# Altium PCB Mad17(grr).PcbDoc (part 2 of 3)
Units mil, origin at the board's own origin, x right, y up, seen from the top; angles counter-clockwise.
Board outline 5600 x 3900 mil, 2 copper layers (Top Layer, Bottom Layer); 72 components, 51 nets, 251 pads, 49 vias.
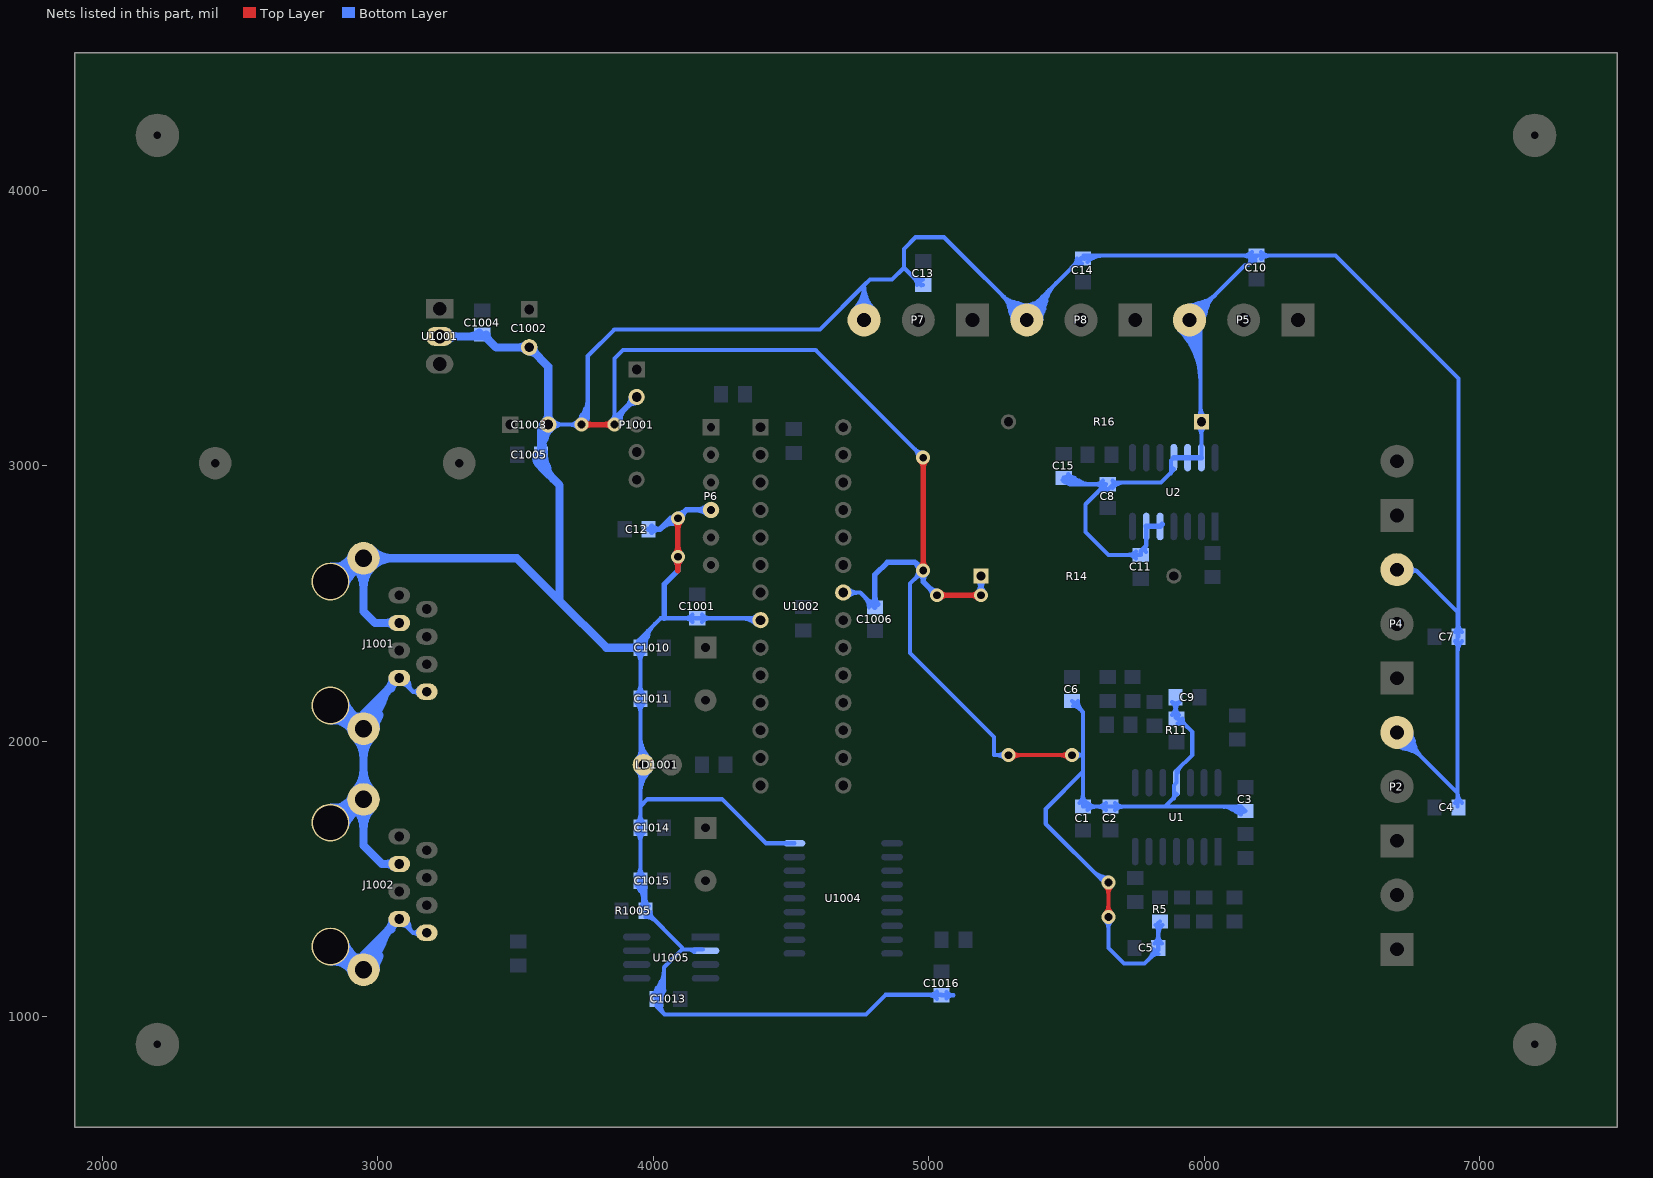
[diagram p2: the nets of this part, all layers, seen from the top]

## Via types
v1: diameter 50, hole 28, Top Layer to Bottom Layer, 49 vias

## Nets (pads, with @x,y where several pads share a name; then routed paths per layer and width w, separated by ;. In a path a pad name is that pad's centre, name@x,y a point inside that pad or via, vN(x,y) a via of type N, cw(c..) or ccw(c..) an arc to the next point about the centre after c; other vN are vias at no path point) (continued)
CAN_GND: C1.2 C2.2 C3.1 C4.2 C5.1 C6.1 C7.2 C8.2 C9.1 C10.2 C11.1 C12.2 C13.2 C14.2 C15.1 C1001.2 C1002.2 C1003.2 C1004.1 C1005.1 C1006.1 C1010.1 C1011.1 C1013.2 C1014.1 C1015.1 C1016.2 J1001.3 J1001.7 J1001.8 J1001.S J1002.3 J1002.7 J1002.8 J1002.S LD1001.2 P2.3 P4.3 P5.3 P6.4 P7.3 P8.3 P1001.2 R5.1 R11.2 R14.1 R16.1 R1005.2 U1.11 U2.5 U2.6 U2.11 U2.12 U2.13 U1001.2 U1002.8 U1002.22 U1004.9 U1005.2 | length 60231.9
  Top Layer w15: v1(5290,1950) v1(5520,1950) ; v1(5652.68,1362.68) v1(5652.68,1487.32) ; 5332.25,1950 cw(c5332.25,1992.25) 5302.37,1962.37 ccw(c5332.25,1992.25) 5332.25,1950 ; 5332.25,1950 ccw(c5332.25,1907.75) 5302.37,1937.63 cw(c5332.25,1907.75) 5332.25,1950 ; 5477.75,1950 cw(c5477.75,1907.75) 5507.63,1937.63 ccw(c5477.75,1907.75) 5477.75,1950 ; 5477.75,1950 ccw(c5477.75,1992.25) 5507.63,1962.37 cw(c5477.75,1992.25) 5477.75,1950 ; 5652.68,1404.93 cw(c5610.44,1404.93) 5640.31,1375.06 ccw(c5610.44,1404.93) 5652.68,1404.93 ; 5652.68,1404.93 ccw(c5694.93,1404.93) 5665.06,1375.06 cw(c5694.93,1404.93) 5652.68,1404.93 ; 5652.68,1445.07 cw(c5694.93,1445.07) 5665.06,1474.94 ccw(c5694.93,1445.07) 5652.68,1445.07 ; 5652.68,1445.07 ccw(c5610.44,1445.07) 5640.31,1474.94 cw(c5610.44,1445.07) 5652.68,1445.07
  Top Layer w20: v1(3740,3150) v1(3860,3150) ; 4090,2620 v1(4090,2670) v1(4090,2810) ; v1(4980,2620) v1(4980,3030) ; v1(5030,2530) v1(5190,2530) ; 3776.21,3150 cw(c3776.21,3186.21) 3750.61,3160.61 ccw(c3776.21,3186.21) 3776.21,3150 ; 3776.21,3150 ccw(c3776.21,3113.79) 3750.61,3139.39 cw(c3776.21,3113.79) 3776.21,3150 ; 3823.79,3150 cw(c3823.79,3113.79) 3849.39,3139.39 ccw(c3823.79,3113.79) 3823.79,3150 ; 3823.79,3150 ccw(c3823.79,3186.21) 3849.39,3160.61 cw(c3823.79,3186.21) 3823.79,3150 ; 4090,2633.79 cw(c4126.21,2633.79) 4100.61,2659.39 ccw(c4126.21,2633.79) 4090,2633.79 ; 4090,2633.79 ccw(c4053.79,2633.79) 4079.39,2659.39 cw(c4053.79,2633.79) 4090,2633.79 ; 4090,2706.21 cw(c4053.79,2706.21) 4079.39,2680.61 ccw(c4053.79,2706.21) 4090,2706.21 ; 4090,2706.21 ccw(c4126.21,2706.21) 4100.61,2680.61 cw(c4126.21,2706.21) 4090,2706.21 ; 4090,2773.79 cw(c4126.21,2773.79) 4100.61,2799.39 ccw(c4126.21,2773.79) 4090,2773.79 ; 4090,2773.79 ccw(c4053.79,2773.79) 4079.39,2799.39 cw(c4053.79,2773.79) 4090,2773.79 ; 4980,2656.21 cw(c4943.79,2656.21) 4969.39,2630.61 ccw(c4943.79,2656.21) 4980,2656.21 ; 4980,2656.21 ccw(c5016.21,2656.21) 4990.61,2630.61 cw(c5016.21,2656.21) 4980,2656.21 ; 4980,2993.79 cw(c5016.21,2993.79) 4990.61,3019.39 ccw(c5016.21,2993.79) 4980,2993.79 ; 4980,2993.79 ccw(c4943.79,2993.79) 4969.39,3019.39 cw(c4943.79,2993.79) 4980,2993.79 ; 5066.21,2530 cw(c5066.21,2566.21) 5040.61,2540.61 ccw(c5066.21,2566.21) 5066.21,2530 ; 5066.21,2530 ccw(c5066.21,2493.79) 5040.61,2519.39 cw(c5066.21,2493.79) 5066.21,2530 ; 5153.79,2530 cw(c5153.79,2493.79) 5179.39,2519.39 ccw(c5153.79,2493.79) 5153.79,2530 ; 5153.79,2530 ccw(c5153.79,2566.21) 5179.39,2540.61 cw(c5153.79,2566.21) 5153.79,2530
  Bottom Layer w15: J1002.7@3078.43,1355 3128.43,1305 ; J1001.7@3078.43,2230 3128.43,2180 ; J1002.7@3091.97,1362.06 cw(c3071.78,1323.51) 3114.48,1331.89 ; J1001.7@3091.97,2237.06 cw(c3071.78,2198.51) 3114.48,2206.89 ; J1002.8@3178.43,1305 3128.43,1305 ; J1001.8@3178.43,2180 3128.43,2180 ; C1003.2@3618.9,3150 v1(3740,3150) 3762.5,3172.5 3762.5,3398.57 3858.93,3495 4605,3495 4765.75,3655.75 ; v1@3735.47,3166.9 ccw(c3726.67,3199.75) 3756.12,3182.75 ; 3741.27,3186 ccw(c3770.09,3169.36) v1@3742.1,3151.35 ; 3753.56,3207.3 ccw(c3793.34,3184.33) v1@3754.72,3159.47 ; v1@3756.38,3156.15 cw(c3791.06,3169.18) 3758.98,3187.7 ; v1(3860,3150) 3860,3170 3860,3390 3890,3420 4590,3420 v1(4980,3030) ; C1010.1@3945.35,2360.15 ccw(c3925.8,2399.6) 3968.34,2388.21 ; C1015.1@3949.17,1472.41 cw(c3942.08,1442.88) 3968.38,1458.07 cw(c3987.22,1468.95) C1015.1@3968.75,1480.44 ; C1010.1@3951.84,2346.61 ccw(c3918.28,2404.74) 3983.11,2387.37 ; 3952.54,1456.52 cw(c3975.96,1470.04) C1015.1@3955.7,1487.95 ; R1005.2@3955.95,1397.98 ccw(c3907.88,1425.73) 3961.49,1440.1 ; 3962.96,1438.47 cw(c3992.42,1455.48) C1015.1@3966.94,1478.02 ; 3965.71,2378.39 ccw(c3998.05,2369.72) C1010.1@3969.05,2352.98 ; 3965.82,1423.94 ccw(c3996.58,1432.19) R1005.2@3980.66,1404.6 ; R1005.2@3974.59,1381.9 ccw(c4012.06,1392.43) 4001.98,1354.83 ; C1013.2@4007.12,1086.44 ccw(c3998.65,1118.83) 4027.54,1101.92 ; C1013.2@4011.69,1065 4011.69,1038.31 4041.69,1008.31 ; C1013.2@4014.34,1070.53 cw(c4043.8,1088.28) 4014.75,1106.69 ; C1013.2@4016.69,1086.32 ccw(c4022.55,1106.73) 4040.87,1096 ; C1013.2@4017.5,1070.81 4040,1093.31 ; C1013.2@4027.19,1078.27 cw(c4067.05,1102.29) 4027.74,1127.2 ; C1013.2@4029.2,1073.51 cw(c4081.31,1087.14) 4034.83,1114.35 ; 4138.32,1242.61 ccw(c4142.97,1250.67) U1005.2@4149.17,1243.73 ; U1005.2@4180,1245 4105,1245 ; U1002.8@4390,2440 4383.31,2446.69 C1001.2@4160,2446.69 4040,2446.69 4026.69,2446.69 3953.39,2373.39 ; U1004.9@4512.83,1630 4410,1630 4250,1790 3980,1790 3953.39,1763.39 ; U1002.22@4690,2540 4751.61,2540 C1006.1@4805,2486.61 ; P7.3@4765.75,3530 4765.75,3655.75 ; 4774.83,2516.98 ccw(c4812.43,2527.06) C1006.1@4801.9,2489.59 ; 4946.03,3682.83 cw(c4936.11,3645.82) C13.2@4973.08,3655.88 ; 4960,2600 4932.5,2572.5 4932.5,2321.14 5237.5,2016.14 5237.5,1950 v1(5290,1950) ; C13.2@4972.61,3676.69 C13.2@4980,3676.69 ; C13.2@4980,3656.69 4972.61,3656.69 4910,3719.3 ; C1016.2@5046.69,1078.39 5090,1078.39 ; C1016.2@5046.69,1080 4843.64,1080 4771.95,1008.31 4135.62,1008.31 4135.29,1007.97 4061.33,1007.97 4060.99,1008.31 4041.69,1008.31 ; 5289.22,3584.42 ccw(c5371.98,3606.6) P8.3@5354.79,3522.65 ; 5295.5,3560.97 ccw(c5366.54,3580.01) P8.3@5351.79,3507.96 ; 5301.88,3597.08 cw(c5279.7,3514.31) P8.3@5363.65,3531.5 ; 5325.33,3590.8 cw(c5306.29,3519.76) P8.3@5378.34,3534.51 ; P8.3@5333.8,3529.8 cw(c5393.93,3530.33) 5378.36,3588.41 ; P8.3@5353.65,3537.02 ccw(c5307.1,3660.28) 5434.44,3626.42 ; P8.3@5354.38,3537.25 ccw(c5334.1,3614.03) 5410.81,3593.48 ; P8.3@5356.3,3530 5056.3,3830 4952.68,3830 4910,3787.32 4910,3719.3 ; P8.3@5356.3,3557 5552.61,3753.31 C14.2@5560,3753.31 ; P8.3@5358.21,3522.75 ccw(c5341.72,3585.2) 5404.11,3568.48 ; P8.3@5358.95,3522.98 ccw(c5319.78,3626.73) 5426.94,3598.23 ; P8.3@5364.25,3508.95 ccw(c5332.45,3593.17) 5419.45,3570.03 ; C15.1@5490,2956.69 5513.39,2933.31 5642.61,2933.31 5570,2860.7 5570,2760 5653.39,2676.61 C11.1@5770,2676.61 5770,2690 5790,2710 ; C15.1@5495.65,2954.12 cw(c5514.19,2926.33) 5531.14,2955.12 ; C15.1@5500.4,2939.79 cw(c5514.3,2903.43) 5533.77,2937.14 ; C15.1@5503.98,2941.64 cw(c5528.94,2904.22) 5551.76,2942.99 ; C15.1@5511.41,2961.38 ccw(c5543.75,2970.04) 5527.01,2941.04 ; v1(5520,1950) 5560,1950 ; C6.1@5520,2146.69 5560,2106.69 5560,1950 ; C6.1@5523.1,2143.72 cw(c5512.57,2106.25) 5550.17,2116.32 ; 5526.03,3727.17 ccw(c5516.11,3764.18) C14.2@5553.08,3754.12 ; C14.2@5562.61,3763.31 C10.2@6190,3763.31 ; 5616.03,2907.17 ccw(c5606.11,2944.18) C8.2@5643.08,2934.12 ; 5617.03,1514.37 cw(c5603.71,1464.67) v1@5650.41,1486.27 ; C8.2@5650,2913.31 5660,2923.31 5676.69,2940 5844.07,2940 5880,2975.93 ; v1(5652.68,1362.68) 5652.68,1250 5709.71,1192.97 5783.67,1192.97 5833.31,1242.61 C5.1@5833.31,1250 5833.31,1340 R5.1@5840,1346.69 ; v1(5652.68,1487.32) 5638.44,1487.32 5425,1700.75 5425,1755 5560,1890 ; U2.6@5790,2780 5790,2710 ; 5807.17,1216.03 cw(c5844.18,1206.11) C5.1@5834.12,1243.08 ; U2.11@5890,3030 5880,3020 5880,2975.93 ; R11.2@5906.92,2084.12 ccw(c5943.89,2094.18) 5933.97,2057.17 ; P5.3@5924.88,3534.87 cw(c5998.02,3518.66) 5978.63,3591.02 ; P5.3@5933.26,3479.29 cw(c5919.66,3428.54) 5965.17,3454.81 ; P5.3@5939.53,3531.62 cw(c6025.23,3512.63) 6002.51,3597.41 ; P5.3@5947.76,3477.51 cw(c5948.37,3442.14) 5979,3459.83 cw(c6002.21,3473.22) P5.3@5983.5,3492.41 ; P5.3@5948.23,3522.63 ccw(c5932.82,3604.83) 6013.6,3583.18 ; P5.3@5951,3507.89 ccw(c5937.69,3578.85) 6007.43,3560.17 ; 5964.38,3456.17 cw(c5996.19,3474.54) P5.3@5971.78,3501.98 ; 5973.58,3440.23 cw(c6008.68,3460.49) P5.3@5981.74,3490.77 ; U2.13@5990,3030 R16.1@5990,3160 5986.3,3163.7 5986.3,3530 5986.3,3567 6149.08,3729.78 6159.78,3729.78 ; 6097,1754.84 ccw(c6112.09,1780.97) C3.1@6133.33,1759.54 ; 6114.01,1745.02 ccw(c6126.42,1766.51) C3.1@6143.89,1748.89 ; C3.1@6128.24,1743.59 ccw(c6104.6,1739.48) 6116.6,1760.26 ccw(c6125.2,1775.15) C3.1@6135.37,1761.28 ; C3.1@6150,1746.69 6133.39,1763.31 5857.38,1763.31 ; P2.3@6677.96,2028.08 ccw(c6750.01,2042.84) 6730.97,1971.8 ; P2.3@6692.65,2031.09 ccw(c6776.6,2048.28) 6754.42,1965.52 ; P2.3@6700,2032.6 6920,1812.6 ; P2.3@6701.5,2039.95 cw(c6684.31,1956) 6767.08,1978.18 ; P2.3@6704.51,2054.64 cw(c6689.76,1982.59) 6760.8,2001.63 ; P4.3@6710,2583.7 6724.72,2598.43 6746.3,2620 6770,2620 ; C4.2@6920,1763.31 6920,1812.6 ; C7.2@6923.31,2380 6923.31,3316.69 6476.69,3763.31 C10.2@6190,3763.31 ; 3128.43,1305 cw(c3128.43,1279.41) 3150.01,1293.16 ccw(c3128.43,1279.41) 3128.43,1305 ; 3128.43,1305 ccw(c3128.43,1330.59) 3150.01,1316.84 cw(c3128.43,1330.59) 3128.43,1305 ; 3128.43,2180 cw(c3128.43,2154.41) 3150.01,2168.16 ccw(c3128.43,2154.41) 3128.43,2180 ; 3128.43,2180 ccw(c3128.43,2205.59) 3150.01,2191.84 cw(c3128.43,2205.59) 3128.43,2180 ; 3673.22,3150 cw(c3673.22,3204.32) 3634.81,3165.91 ccw(c3673.22,3204.32) 3673.22,3150 ; 3673.22,3150 ccw(c3673.22,3095.68) 3634.81,3134.09 cw(c3673.22,3095.68) 3673.22,3150 ; 3697.75,3150 cw(c3697.75,3107.75) 3727.63,3137.63 ccw(c3697.75,3107.75) 3697.75,3150 ; 3697.75,3150 ccw(c3697.75,3192.25) v1@3727.63,3162.37 ; 3697.75,3150 ccw(c3697.75,3192.25) v1@3727.63,3162.37 ; v1@3727.63,3162.37 ccw(c3643.43,3246.57) 3762.5,3246.57 cw(c3643.43,3246.57) v1@3727.63,3162.37 ; 3860,3192.25 cw(c3817.75,3192.25) 3847.63,3162.37 ccw(c3817.75,3192.25) 3860,3192.25 ; 3860,3192.25 ccw(c3902.25,3192.25) 3872.37,3162.37 cw(c3902.25,3192.25) 3860,3192.25 ; 3953.39,1541.55 cw(c3909.71,1541.55) 3940.59,1510.67 ccw(c3909.71,1541.55) 3953.39,1541.55 ; 3953.39,1541.55 ccw(c3997.06,1541.55) 3966.18,1510.67 cw(c3997.06,1541.55) 3953.39,1541.55 ; 3953.39,1638.45 cw(c3997.06,1638.45) 3966.18,1669.33 ccw(c3997.06,1638.45) 3953.39,1638.45 ; 3953.39,1638.45 ccw(c3909.71,1638.45) 3940.59,1669.33 cw(c3909.71,1638.45) 3953.39,1638.45 ; 3953.39,1733.67 cw(c3909.71,1733.67) 3940.59,1702.79 ccw(c3909.71,1733.67) 3953.39,1733.67 ; 3953.39,1733.67 ccw(c3997.06,1733.67) 3966.18,1702.79 cw(c3997.06,1733.67) 3953.39,1733.67 ; 3953.39,1763.39 3953.39,1915 C1011.1@3953.39,2155 C1010.1@3953.39,2340 3953.39,2373.39 ; 3953.39,1763.39 C1014.1@3953.39,1686.06 C1015.1@3953.39,1493.94 3971.61,1475.71 R1005.2@3971.61,1385 4105,1251.61 4105,1245 ; 3953.39,2107.39 cw(c3997.06,2107.39) 3966.18,2138.27 ccw(c3997.06,2107.39) 3953.39,2107.39 ; 3953.39,2107.39 ccw(c3909.71,2107.39) 3940.59,2138.27 cw(c3909.71,2107.39) 3953.39,2107.39 ; 3953.39,2202.61 cw(c3909.71,2202.61) 3940.59,2171.73 ccw(c3909.71,2202.61) 3953.39,2202.61 ; 3953.39,2202.61 ccw(c3997.06,2202.61) 3966.18,2171.73 cw(c3997.06,2202.61) 3953.39,2202.61 ; 3953.39,2292.39 cw(c3997.06,2292.39) 3966.18,2323.27 ccw(c3997.06,2292.39) 3953.39,2292.39 ; 3953.39,2292.39 ccw(c3909.71,2292.39) 3940.59,2323.27 cw(c3909.71,2292.39) 3953.39,2292.39 ; 3953.39,2373.38 cw(c3938.46,2373.38) 3945.21,2360.07 ccw(c3938.46,2373.38) 3953.39,2373.38 ; 3953.39,2373.38 ccw(c3968.31,2373.38) 3961.56,2360.07 cw(c3968.31,2373.38) 3953.39,2373.38 ; 3971.61,1432.61 cw(c3927.94,1432.61) 3958.82,1401.73 ccw(c3927.94,1432.61) 3971.61,1432.61 ; 3971.61,1432.61 ccw(c4015.29,1432.61) 3984.41,1401.73 cw(c4015.29,1432.61) 3971.61,1432.61 ; 4040,1093.31 cw(c4021.91,1111.39) 4015.93,1086.53 ccw(c4021.91,1111.39) 4040,1093.31 ; 4040,1093.31 4040,1180 ; 4040,1179.99 cw(c3901.98,1179.99) 3998.98,1081.81 ccw(c3901.98,1179.99) 4040,1179.99 ; 4040,1180 4105,1245 ; 4041.69,1008.31 cw(c4076.4,1043.02) 4029.12,1056.2 ccw(c4076.4,1043.02) 4041.69,1008.31 ; 4112.39,2446.69 cw(c4112.39,2403.02) 4143.27,2433.9 ccw(c4112.39,2403.02) 4112.39,2446.69 ; 4112.39,2446.69 ccw(c4112.39,2490.37) 4143.27,2459.48 cw(c4112.39,2490.37) 4112.39,2446.69 ; 4207.61,2446.69 cw(c4207.61,2490.37) 4176.73,2459.48 ccw(c4207.61,2490.37) 4207.61,2446.69 ; 4207.61,2446.69 ccw(c4207.61,2403.02) 4176.73,2433.9 cw(c4207.61,2403.02) 4207.61,2446.69 ; 4743.18,2540 cw(c4743.18,2593.18) 4705.58,2555.58 ccw(c4743.18,2593.18) 4743.18,2540 ; 4743.18,2540 ccw(c4743.18,2486.82) 4705.58,2524.42 cw(c4743.18,2486.82) 4743.18,2540 ; 4765.75,3619.82 cw(c4676.94,3619.82) 4739.38,3556.67 ccw(c4676.94,3619.82) 4765.75,3619.82 ; 4765.75,3619.82 ccw(c4854.56,3619.82) 4792.11,3556.67 cw(c4854.56,3619.82) 4765.75,3619.82 ; 4765.75,3655.74 cw(c4641.42,3655.74) 4728.83,3567.33 ccw(c4641.42,3655.74) 4765.75,3655.74 ; 4765.75,3655.74 ccw(c4890.08,3655.74) 4802.66,3567.33 cw(c4890.08,3655.74) 4765.75,3655.74 ; 4765.75,3655.75 4786.69,3676.69 4867.39,3676.69 4910,3719.3 ; 4950.13,2590.13 cw(c4980,2560.25) 4980,2602.5 ccw(c4980,2560.25) 4950.13,2590.13 ; 4950.13,2590.13 ccw(c4920.25,2620) 4962.5,2620 cw(c4920.25,2620) 4950.13,2590.13 ; 4950.13,3059.87 cw(c4920.25,3030) 4962.5,3030 ccw(c4920.25,3030) 4950.13,3059.87 ; 4950.13,3059.87 ccw(c4980,3089.75) 4980,3047.5 cw(c4980,3089.75) 4950.13,3059.87 ; 5090,1078.39 cw(c5090,1112.18) 5064.36,1090.17 ccw(c5090,1112.18) 5090,1078.39 ; 5090,1078.39 ccw(c5090,1044.6) 5064.36,1066.6 cw(c5090,1044.6) 5090,1078.39 ; 5247.75,1950 cw(c5247.75,1907.75) 5277.63,1937.63 ccw(c5247.75,1907.75) 5247.75,1950 ; 5247.75,1950 ccw(c5247.75,1992.25) 5277.63,1962.37 cw(c5247.75,1992.25) 5247.75,1950 ; 5266.68,3619.62 cw(c5177.05,3530) 5303.8,3530 ccw(c5177.05,3530) 5266.68,3619.62 ; 5266.68,3619.62 ccw(c5356.3,3709.25) P8.3@5356.3,3582.5 ; 5266.68,3619.62 ccw(c5356.3,3709.25) P8.3@5356.3,3582.5 ; 5292.28,3594.02 cw(c5228.27,3530) 5318.8,3530 ccw(c5228.27,3530) 5292.28,3594.02 ; 5292.28,3594.02 ccw(c5356.3,3658.03) 5356.3,3567.5 cw(c5356.3,3658.03) 5292.28,3594.02 ; P8.3@5356.3,3582.5 ccw(c5356.3,3644.06) 5399.83,3600.53 cw(c5356.3,3644.06) P8.3@5356.3,3582.5 ; 5560,1806.98 cw(c5516.33,1806.98) 5547.21,1776.1 ccw(c5516.33,1806.98) 5560,1806.98 ; 5560,1806.98 ccw(c5603.67,1806.98) 5572.79,1776.1 cw(c5603.67,1806.98) 5560,1806.98 ; 5560,1890 5560,1950 ; 5560,1890 C1.2@5560,1763.31 C2.2@5660,1763.31 5857.38,1763.31 ; 5560,1950 cw(c5560,1986.96) 5532.85,1961.88 ccw(c5560,1986.96) 5560,1950 ; 5560,1950 ccw(c5560,1913.04) 5532.85,1938.12 cw(c5560,1913.04) 5560,1950 ; 5602.39,2933.31 cw(c5602.39,2889.63) 5633.27,2920.52 ccw(c5602.39,2889.63) 5602.39,2933.31 ; 5602.39,2933.31 ccw(c5602.39,2976.98) 5633.27,2946.1 cw(c5602.39,2976.98) 5602.39,2933.31 ; 5607.61,1763.31 cw(c5607.61,1806.98) 5576.73,1776.1 ccw(c5607.61,1806.98) 5607.61,1763.31 ; 5607.61,1763.31 ccw(c5607.61,1719.63) 5576.73,1750.52 cw(c5607.61,1719.63) 5607.61,1763.31 ; 5612.39,1763.31 cw(c5612.39,1719.63) 5643.27,1750.52 ccw(c5612.39,1719.63) 5612.39,1763.31 ; 5612.39,1763.31 ccw(c5612.39,1806.98) 5643.27,1776.1 cw(c5612.39,1806.98) 5612.39,1763.31 ; 5652.68,1320.44 cw(c5694.93,1320.44) 5665.06,1350.31 ccw(c5694.93,1320.44) 5652.68,1320.44 ; 5652.68,1320.44 ccw(c5610.44,1320.44) 5640.31,1350.31 cw(c5610.44,1320.44) 5652.68,1320.44 ; 5707.61,1763.31 cw(c5707.61,1806.98) 5676.73,1776.1 ccw(c5707.61,1806.98) 5707.61,1763.31 ; 5707.61,1763.31 ccw(c5707.61,1719.63) 5676.73,1750.52 cw(c5707.61,1719.63) 5707.61,1763.31 ; 5722.39,2676.61 cw(c5722.39,2632.94) 5753.27,2663.82 ccw(c5722.39,2632.94) 5722.39,2676.61 ; 5722.39,2676.61 ccw(c5722.39,2720.29) 5753.27,2689.41 cw(c5722.39,2720.29) 5722.39,2676.61 ; 5790,2710 ccw(c5802.18,2697.82) 5788.4,2687.48 cw(c5802.18,2697.82) 5790,2710 ; 5833.31,1297.61 cw(c5789.63,1297.61) 5820.52,1266.73 ccw(c5789.63,1297.61) 5833.31,1297.61 ; 5833.31,1297.61 ccw(c5876.98,1297.61) 5846.1,1266.73 cw(c5876.98,1297.61) 5833.31,1297.61 ; 5857.38,1763.31 5890,1795.93 ; 5880,2975.93 ccw(c5867.19,2988.74) 5885.07,2991.69 cw(c5867.19,2988.74) 5880,2975.93 ; 5890,1795.93 ccw(c5877.19,1808.74) 5895.07,1811.69 cw(c5877.19,1808.74) 5890,1795.93 ; 5890,1795.93 5890,1840 U1.11@5900,1850 5900,1894.07 5957.03,1951.1 5957.03,2033.67 5907.39,2083.31 R11.2@5900,2083.31 5896.69,2086.61 5896.69,2130 ; 5896.69,2112.39 cw(c5940.37,2112.39) 5909.48,2143.27 ccw(c5940.37,2112.39) 5896.69,2112.39 ; 5896.69,2112.39 ccw(c5853.02,2112.39) 5883.9,2143.27 cw(c5853.02,2112.39) 5896.69,2112.39 ; 5896.69,2130 cw(c5906.42,2130) 5903.02,2139.11 ccw(c5906.42,2130) 5896.69,2130 ; 5896.69,2130 ccw(c5886.96,2130) 5890.37,2139.11 cw(c5886.96,2130) 5896.69,2130 ; 5990,3111.57 cw(c6038.43,3111.57) 6004.18,3145.82 ccw(c6038.43,3111.57) 5990,3111.57 ; 5990,3111.57 ccw(c5941.57,3111.57) 5975.82,3145.82 cw(c5941.57,3111.57) 5990,3111.57 ; 6142.39,3763.31 cw(c6142.39,3719.63) 6173.27,3750.52 ccw(c6142.39,3719.63) 6142.39,3763.31 ; 6142.39,3763.31 ccw(c6142.39,3806.98) 6173.27,3776.1 cw(c6142.39,3806.98) 6142.39,3763.31 ; 6159.78,3729.78 ccw(c6137.14,3752.43) 6168.4,3759.38 cw(c6137.14,3752.43) 6159.78,3729.78 ; 6159.78,3729.78 6190,3760 C10.2@6190,3763.31 ; 6237.61,3763.31 cw(c6237.61,3806.98) 6206.73,3776.1 ccw(c6237.61,3806.98) 6237.61,3763.31 ; 6237.61,3763.31 ccw(c6237.61,3719.63) 6206.73,3750.52 cw(c6237.61,3719.63) 6237.61,3763.31 ; 6764.02,1968.58 cw(c6828.03,2032.6) 6737.5,2032.6 ccw(c6828.03,2032.6) 6764.02,1968.58 ; 6764.02,1968.58 ccw(c6700,1904.57) 6700,1995.1 cw(c6700,1904.57) 6764.02,1968.58 ; 6770,2620 cw(c6770,2639.35) 6751.15,2634.99 ccw(c6770,2639.35) 6770,2620 ; 6770,2620 ccw(c6770,2598.18) 6749.45,2605.51 cw(c6770,2598.18) 6770,2620 ; 6770,2620 6920,2470 6920,2380 6920,1812.6 ; 6789.62,1942.98 cw(c6879.25,2032.6) 6752.5,2032.6 ccw(c6879.25,2032.6) 6789.62,1942.98 ; 6789.62,1942.98 ccw(c6700,1853.35) 6700,1980.1 cw(c6700,1853.35) 6789.62,1942.98 ; C7.2@6910.52,2396.73 ccw(c6879.63,2427.61) 6923.31,2427.61 ; C7.2@6910.52,2396.73 ccw(c6887.62,2419.63) 6920,2419.63 cw(c6887.62,2419.63) C7.2@6910.52,2396.73 ; C7.2@6910.52,2396.73 ccw(c6879.63,2427.61) 6923.31,2427.61 ; 6920,1812.6 ccw(c6967.93,1812.6) 6935.53,1777.27 cw(c6967.93,1812.6) 6920,1812.6 ; 6923.31,2427.61 ccw(c6966.98,2427.61) C7.2@6936.1,2396.73 ; 6923.31,2427.61 ccw(c6966.98,2427.61) C7.2@6936.1,2396.73 ; C7.2@6936.1,2396.73 cw(c6974.97,2435.6) 6920,2435.6 ccw(c6974.97,2435.6) C7.2@6936.1,2396.73 ; J1002.7@3088.27,1332.97 cw(c3088.27,1303.56) 3109.07,1324.36 ccw(c3088.27,1303.56) J1002.7@3088.27,1332.97 ; J1001.7@3088.27,2207.97 cw(c3088.27,2178.56) 3109.07,2199.36 ccw(c3088.27,2178.56) J1001.7@3088.27,2207.97 ; J1002.7@3095.28,1354.52 ccw(c3128.99,1352.22) 3105.1,1328.33 cw(c3128.99,1352.22) J1002.7@3095.28,1354.52 ; J1001.7@3095.28,2229.52 ccw(c3128.99,2227.22) 3105.1,2203.33 cw(c3128.99,2227.22) J1001.7@3095.28,2229.52 ; J1002.7@3110.24,1353.5 ccw(c3172.66,1349.24) 3128.42,1305 cw(c3172.66,1349.24) J1002.7@3110.24,1353.5 ; J1001.7@3110.24,2228.5 ccw(c3172.66,2224.24) 3128.42,2180 cw(c3172.66,2224.24) J1001.7@3110.24,2228.5 ; v1@3738.23,3151.77 ccw(c3679.64,3210.36) 3762.5,3210.36 cw(c3679.64,3210.36) v1@3738.23,3151.77 ; v1@3748.84,3141.16 ccw(c3715.86,3174.14) 3762.5,3174.14 cw(c3715.86,3174.14) v1@3748.84,3141.16 ; C1015.1@3940.59,1477.21 cw(c3865.7,1402.32) 3971.61,1402.32 ccw(c3865.7,1402.32) C1015.1@3940.59,1477.21 ; C1010.1@3941.48,2343.94 cw(c3983.82,2343.94) 3953.88,2373.88 ccw(c3983.82,2343.94) C1010.1@3941.48,2343.94 ; LD1001.2@3942.46,1892.46 cw(c3916.1,1866.1) 3953.39,1866.1 ccw(c3916.1,1866.1) LD1001.2@3942.46,1892.46 ; LD1001.2@3942.46,1937.54 ccw(c3916.1,1963.9) 3953.39,1963.9 cw(c3916.1,1963.9) LD1001.2@3942.46,1937.54 ; C1015.1@3951.2,1487.81 cw(c3901.92,1438.53) 3971.61,1438.53 ccw(c3901.92,1438.53) C1015.1@3951.2,1487.81 ; 3953.39,1810.02 cw(c4069.98,1810.02) 3987.54,1892.46 ccw(c4069.98,1810.02) 3953.39,1810.02 ; 3953.39,1846.23 cw(c4033.77,1846.23) 3976.93,1903.07 ccw(c4033.77,1846.23) 3953.39,1846.23 ; 3953.39,1983.77 ccw(c4033.77,1983.77) 3976.93,1926.93 cw(c4033.77,1983.77) 3953.39,1983.77 ; 3953.39,2019.98 ccw(c4069.98,2019.98) 3987.54,1937.54 cw(c4069.98,2019.98) 3953.39,2019.98 ; C1010.1@3956.48,2343.94 cw(c4035.03,2343.94) 3979.49,2399.49 ccw(c4035.03,2343.94) C1010.1@3956.48,2343.94 ; C1010.1@3971.48,2343.94 cw(c4086.25,2343.94) 4005.09,2425.09 ccw(c4086.25,2343.94) C1010.1@3971.48,2343.94 ; R1005.2@3971.61,1362.97 cw(c3971.61,1309.79) 4009.22,1347.4 ccw(c3971.61,1309.79) R1005.2@3971.61,1362.97 ; R1005.2@3989.7,1381.06 ccw(c4023.87,1381.06) 3999.71,1356.9 cw(c4023.87,1381.06) R1005.2@3989.7,1381.06 ; C1013.2@4009.52,1071.14 ccw(c3937.45,1144.09) 4040,1144.09 cw(c3937.45,1144.09) C1013.2@4009.52,1071.14 ; C1013.2@4014.67,1060.23 ccw(c4048,1050.94) 4023.53,1026.47 cw(c4048,1050.94) C1013.2@4014.67,1060.23 ; C1013.2@4020.06,1060.46 ccw(c3972.92,1108.19) 4040,1108.19 cw(c3972.92,1108.19) C1013.2@4020.06,1060.46 ; C1013.2@4029.78,1068.94 cw(c4063.95,1068.94) 4039.79,1093.1 ccw(c4063.95,1068.94) C1013.2@4029.78,1068.94 ; 4128.36,1245 cw(c4128.36,1215.86) 4148.96,1236.46 ccw(c4128.36,1215.86) 4128.36,1245 ; 4320.66,2446.69 cw(c4320.66,2370.66) 4374.42,2424.42 ccw(c4320.66,2370.66) 4320.66,2446.69 ; 4352.98,2446.69 ccw(c4352.98,2477.02) 4374.42,2455.58 cw(c4352.98,2477.02) 4352.98,2446.69 ; 4356.88,2446.69 cw(c4356.88,2406.88) 4385.03,2435.03 ccw(c4356.88,2406.88) 4356.88,2446.69 ; 4767.4,2524.22 cw(c4729.79,2486.61) 4782.97,2486.61 ccw(c4729.79,2486.61) 4767.4,2524.22 ; 4776.9,2514.71 ccw(c4801.06,2538.87) 4801.06,2504.7 cw(c4801.06,2538.87) 4776.9,2514.71 ; 4939.28,3690.02 ccw(c4976.06,3726.81) 4976.06,3674.78 cw(c4976.06,3726.81) 4939.28,3690.02 ; 4947.63,3681.67 cw(c4922.65,3656.69) 4957.97,3656.69 ccw(c4922.65,3656.69) 4947.63,3681.67 ; 4995.18,1080 cw(c4995.18,1030.81) 5029.96,1065.59 ccw(c4995.18,1030.81) 4995.18,1080 ; 5002.98,1080 ccw(c5002.98,1118.16) 5029.96,1091.18 cw(c5002.98,1118.16) 5002.98,1080 ; P8.3@5363.8,3530 cw(c5447.09,3530) 5388.2,3588.9 ccw(c5447.09,3530) P8.3@5363.8,3530 ; P8.3@5378.8,3530 cw(c5498.31,3530) 5413.8,3614.5 ccw(c5498.31,3530) P8.3@5378.8,3530 ; P8.3@5393.8,3530 cw(c5549.52,3530) 5439.41,3640.11 ccw(c5549.52,3530) P8.3@5393.8,3530 ; P8.3@5408.8,3530 cw(c5600.73,3530) 5465.01,3665.72 ccw(c5600.73,3530) P8.3@5408.8,3530 ; C15.1@5485.52,2948.27 ccw(c5521.64,2984.4) 5521.64,2933.31 cw(c5521.64,2984.4) C15.1@5485.52,2948.27 ; C15.1@5496.12,2958.88 ccw(c5557.86,3020.61) 5557.86,2933.31 cw(c5557.86,3020.61) C15.1@5496.12,2958.88 ; C15.1@5506.73,2969.48 ccw(c5594.07,3056.83) 5594.07,2933.31 cw(c5594.07,3056.83) C15.1@5506.73,2969.48 ; 5519.28,3719.98 cw(c5556.06,3683.19) 5556.06,3735.22 ccw(c5556.06,3683.19) 5519.28,3719.98 ; C6.1@5523.94,2128.6 cw(c5523.94,2094.43) 5548.1,2118.59 ccw(c5523.94,2094.43) C6.1@5523.94,2128.6 ; 5527.63,3728.33 ccw(c5502.65,3753.31) 5537.97,3753.31 cw(c5502.65,3753.31) 5527.63,3728.33 ; C6.1@5542.03,2146.69 ccw(c5595.21,2146.69) 5557.6,2109.09 cw(c5595.21,2146.69) C6.1@5542.03,2146.69 ; C14.2@5566.12,3751.12 cw(c5595.54,3721.7) 5595.54,3763.31 ccw(c5595.54,3721.7) C14.2@5566.12,3751.12 ; C14.2@5576.73,3740.52 cw(c5631.75,3685.49) 5631.75,3763.31 ccw(c5631.75,3685.49) C14.2@5576.73,3740.52 ; 5598.49,1527.26 ccw(c5652.68,1581.46) 5652.68,1504.82 cw(c5652.68,1581.46) 5598.49,1527.26 ; 5609.28,2899.98 cw(c5646.06,2863.19) 5646.06,2915.22 ccw(c5646.06,2863.19) 5609.28,2899.98 ; 5617.63,2908.33 ccw(c5592.65,2933.31) 5627.97,2933.31 cw(c5592.65,2933.31) 5617.63,2908.33 ; 5624.1,1501.66 ccw(c5652.68,1530.24) 5652.68,1489.82 cw(c5652.68,1530.24) 5624.1,1501.66 ; C8.2@5666.73,2920.52 cw(c5713.77,2873.47) 5713.77,2940 ccw(c5713.77,2873.47) C8.2@5666.73,2920.52 ; C8.2@5666.73,2946.1 ccw(c5681.45,2960.82) 5681.45,2940 cw(c5681.45,2960.82) C8.2@5666.73,2946.1 ; 5799.98,1209.28 ccw(c5763.19,1246.06) 5815.22,1246.06 cw(c5763.19,1246.06) 5799.98,1209.28 ; 5808.33,1217.63 cw(c5833.31,1192.65) 5833.31,1227.97 ccw(c5833.31,1192.65) 5808.33,1217.63 ; R5.1@5823.27,1333.9 cw(c5799.04,1309.67) 5833.31,1309.67 ccw(c5799.04,1309.67) R5.1@5823.27,1333.9 ; 5833.31,1296.37 cw(c5886.39,1296.37) 5848.85,1333.9 ccw(c5886.39,1296.37) 5833.31,1296.37 ; 5876.82,2972.75 ccw(c5857.07,2992.5) 5885,2992.5 cw(c5857.07,2992.5) 5876.82,2972.75 ; 5880,2973.15 cw(c5894.98,2973.15) 5891.25,2987.66 ccw(c5894.98,2973.15) 5880,2973.15 ; R11.2@5883.27,2096.1 ccw(c5850.87,2128.5) 5896.69,2128.5 cw(c5850.87,2128.5) R11.2@5883.27,2096.1 ; 5886.82,1792.75 ccw(c5867.07,1812.5) 5895,1812.5 cw(c5867.07,1812.5) 5886.82,1792.75 ; 5890,1793.15 cw(c5904.98,1793.15) 5901.25,1807.66 ccw(c5904.98,1793.15) 5890,1793.15 ; 5896.69,2125.46 ccw(c5938.22,2125.46) 5908.85,2096.1 cw(c5938.22,2125.46) 5896.69,2125.46 ; R11.2@5903.94,2065.22 cw(c5903.94,2013.19) 5940.72,2049.98 ccw(c5903.94,2013.19) R11.2@5903.94,2065.22 ; U1.11@5905,1887.5 cw(c5932.93,1887.5) 5913.18,1907.25 ccw(c5932.93,1887.5) U1.11@5905,1887.5 ; P5.3@5909.73,3492.88 cw(c5724.87,3308.02) 5986.3,3308.02 ccw(c5724.87,3308.02) P5.3@5909.73,3492.88 ; P5.3@5920.33,3503.48 cw(c5761.08,3344.23) 5986.3,3344.23 ccw(c5761.08,3344.23) P5.3@5920.33,3503.48 ; R11.2@5922.03,2083.31 ccw(c5957.35,2083.31) 5932.37,2058.33 cw(c5957.35,2083.31) R11.2@5922.03,2083.31 ; P5.3@5930.94,3514.09 cw(c5797.29,3380.44) 5986.3,3380.44 ccw(c5797.29,3380.44) P5.3@5930.94,3514.09 ; P5.3@5941.55,3524.7 cw(c5833.51,3416.66) 5986.3,3416.66 ccw(c5833.51,3416.66) P5.3@5941.55,3524.7 ; P5.3@5946.85,3567.5 ccw(c5946.85,3663.94) 6015.05,3595.75 cw(c5946.85,3663.94) P5.3@5946.85,3567.5 ; P5.3@5946.85,3582.5 ccw(c5946.85,3715.16) 6040.65,3621.35 cw(c5946.85,3715.16) P5.3@5946.85,3582.5 ; P5.3@5952.15,3535.3 cw(c5869.72,3452.87) 5986.3,3452.87 ccw(c5869.72,3452.87) P5.3@5952.15,3535.3 ; R16.1@5975.82,3174.18 ccw(c5950.51,3199.49) 5986.3,3199.49 cw(c5950.51,3199.49) R16.1@5975.82,3174.18 ; P5.3@5984.35,3530 cw(c6068.97,3530) 6009.14,3589.84 ccw(c6068.97,3530) P5.3@5984.35,3530 ; 5986.3,3217.36 ccw(c6047.36,3217.36) 6004.18,3174.18 cw(c6047.36,3217.36) 5986.3,3217.36 ; P5.3@5999.35,3530 cw(c6120.19,3530) 6034.74,3615.44 ccw(c6120.19,3530) P5.3@5999.35,3530 ; 6062.28,1763.31 cw(c6062.28,1662.91) 6133.27,1733.9 ccw(c6062.28,1662.91) 6062.28,1763.31 ; 6098.49,1763.31 cw(c6098.49,1699.12) 6143.88,1744.51 ccw(c6098.49,1699.12) 6098.49,1763.31 ; 6167.55,3737.55 cw(c6186.06,3719.03) 6186.06,3745.22 ccw(c6186.06,3719.03) 6167.55,3737.55 ; C4.2@6910.52,1776.73 ccw(c6887.62,1799.63) 6920,1799.63 cw(c6887.62,1799.63) C4.2@6910.52,1776.73 ; C7.2@6910.52,2363.27 cw(c6887.62,2340.37) 6920,2340.37 ccw(c6887.62,2340.37) C7.2@6910.52,2363.27 ; 6920,2324.4 cw(c6974.97,2324.4) 6936.1,2363.27 ccw(c6974.97,2324.4) 6920,2324.4
  Bottom Layer w20: v1@3860,3170 P1001.2@3940,3250 ; v1@3862.5,3145.67 ccw(c3843.8,3178.06) 3879.92,3168.38 ; C12.2@3983.31,2770 4024.28,2770 ; 4040,2446.69 4040,2570 4090,2620 v1(4090,2670) ; 4070.65,2791.02 ccw(c4062.79,2827.59) v1@4094.2,2807.29 ; P6.4@4210,2840 4120,2840 v1(4090,2810) 4064.28,2810 ; C1006.1@4805,2486.61 4805,2605 4850,2650 4950,2650 v1(4980,2620) 4980,2580 v1(5030,2530) ; v1(5190,2530) R14.1@5190,2600 ; P8.3@5356.3,3530 P8.3@5356.3,3557 ; U2.6@5790,2780 U2.5@5840,2780 U2.5@5847.5,2787.5 ; U2.11@5890,3030 U2.12@5940,3030 U2.13@5990,3030 ; 3906.66,3216.66 cw(c3940,3183.33) 3940,3230.47 ccw(c3940,3183.33) 3906.66,3216.66 ; 3906.66,3216.66 ccw(c3873.33,3250) 3920.47,3250 cw(c3873.33,3250) 3906.66,3216.66 ; 4020.95,2770 cw(c4020.95,2807.64) 3994.33,2781.02 ccw(c4020.95,2807.64) 4020.95,2770 ; 4020.95,2770 ccw(c4020.95,2732.36) 3994.33,2758.98 cw(c4020.95,2732.36) 4020.95,2770 ; 4024.29,2770 cw(c4084.94,2709.35) 4089.25,2795.02 ccw(c4084.94,2709.35) 4024.29,2770 ; 4024.28,2770 4064.28,2810 ; 4064.28,2810 cw(c4064.28,2795.46) 4076.94,2802.62 ccw(c4064.28,2795.46) 4064.28,2810 ; 4064.28,2810 ccw(c4064.28,2824.54) 4076.94,2817.38 cw(c4064.28,2824.54) 4064.28,2810 ; 4090,2633.79 cw(c4126.21,2633.79) 4100.61,2659.39 ccw(c4126.21,2633.79) 4090,2633.79 ; 4090,2633.79 ccw(c4053.79,2633.79) 4079.39,2659.39 cw(c4053.79,2633.79) 4090,2633.79 ; 4115.61,2835.61 cw(c4090,2861.21) 4090,2825 ccw(c4090,2861.21) 4115.61,2835.61 ; 4115.61,2835.61 ccw(c4141.21,2810) 4105,2810 cw(c4141.21,2810) 4115.61,2835.61 ; 4161.72,2840 cw(c4161.72,2791.72) 4195.86,2825.86 ccw(c4161.72,2791.72) 4161.72,2840 ; 4161.72,2840 ccw(c4161.72,2888.28) 4195.86,2854.14 cw(c4161.72,2888.28) 4161.72,2840 ; 4805,2524.25 cw(c4767.36,2524.25) 4793.98,2497.64 ccw(c4767.36,2524.25) 4805,2524.25 ; 4805,2524.25 ccw(c4842.64,2524.25) 4816.02,2497.64 cw(c4842.64,2524.25) 4805,2524.25 ; 4954.39,2645.61 cw(c4928.79,2620) 4965,2620 ccw(c4928.79,2620) 4954.39,2645.61 ; 4954.39,2645.61 ccw(c4980,2671.21) 4980,2635 cw(c4980,2671.21) 4954.39,2645.61 ; 4980,2583.79 cw(c5016.21,2583.79) 4990.61,2609.39 ccw(c5016.21,2583.79) 4980,2583.79 ; 4980,2583.79 ccw(c4943.79,2583.79) 4969.39,2609.39 cw(c4943.79,2583.79) 4980,2583.79 ; 5004.39,2555.61 cw(c4978.79,2530) 5015,2530 ccw(c4978.79,2530) 5004.39,2555.61 ; 5004.39,2555.61 ccw(c5030,2581.21) 5030,2545 cw(c5030,2581.21) 5004.39,2555.61 ; 5190,2557.61 cw(c5232.39,2557.61) 5202.42,2587.58 ccw(c5232.39,2557.61) 5190,2557.61 ; 5190,2557.61 ccw(c5147.61,2557.61) 5177.58,2587.58 cw(c5147.61,2557.61) 5190,2557.61 ; 5190,2566.21 cw(c5153.79,2566.21) 5179.39,2540.61 ccw(c5153.79,2566.21) 5190,2566.21 ; 5190,2566.21 ccw(c5226.21,2566.21) 5200.61,2540.61 cw(c5226.21,2566.21) 5190,2566.21 ; v1@3855,3150 cw(c3891.21,3150) 3865.61,3175.61 ccw(c3891.21,3150) v1@3855,3150 ; v1@3875,3150 cw(c3959.5,3150) 3899.75,3209.75 ccw(c3959.5,3150) v1@3875,3150 ; 4056.14,2801.86 cw(c4087.99,2770.01) 4090.25,2814.99 ccw(c4087.99,2770.01) 4056.14,2801.86
  Bottom Layer w30: J1002.S@2848.01,1755.21 ccw(c2889.81,1862.37) J1002.S@2936.02,1757.04 ; J1001.S@2848.01,2630.21 ccw(c2889.81,2737.37) J1001.S@2936.02,2632.04 ; J1002.S@2848.24,1204.88 cw(c2890.15,1098.88) J1002.S@2935.47,1203.47 ; J1001.S@2848.24,2079.88 cw(c2890.15,1973.88) J1001.S@2935.47,2078.47 ; 2873.65,1202.34 ccw(c2891.67,1269.58) J1002.S@2926.48,1209.29 ; 2873.65,2077.34 ccw(c2891.67,2144.58) J1001.S@2926.48,2084.29 ; 2874.55,1757.94 cw(c2892.26,1691.84) J1002.S@2926.48,1751.1 ; 2874.55,2632.94 cw(c2892.26,2566.84) J1001.S@2926.48,2626.1 ; 2874.68,1767.31 cw(c2890.78,1739.42) J1002.S@2915.15,1760.46 ; 2874.68,2642.31 cw(c2890.78,2614.42) J1001.S@2915.15,2635.46 ; 2874.93,1192.71 ccw(c2890.77,1220.13) J1002.S@2914.91,1199.64 ; 2874.93,2067.71 ccw(c2890.77,2095.13) J1001.S@2914.91,2074.64 ; J1002.S@2879.66,1271.73 ccw(c2993.65,1308.94) J1002.S@2945.98,1198.91 ; J1001.S@2879.66,2146.73 ccw(c2993.65,2183.94) J1001.S@2945.98,2073.91 ; J1002.S@2879.68,1688.33 cw(c2994.14,1651.11) J1002.S@2945.78,1761.32 ; J1001.S@2879.68,2563.33 cw(c2994.14,2526.11) J1001.S@2945.78,2636.32 ; 2884.89,1773.21 ccw(c2862.29,1812.35) J1002.S@2905.95,1800.65 ; 2884.89,2648.21 ccw(c2862.29,2687.35) J1001.S@2905.95,2675.65 ; 2885.2,1186.78 cw(c2862.94,1148.21) J1002.S@2905.95,1159.74 ; 2885.2,2061.78 cw(c2862.94,2023.21) J1001.S@2905.95,2034.74 ; 2891.19,1222.65 cw(c2875.54,1117.01) J1002.S@2961.31,1180.64 ; 2891.19,2097.65 cw(c2875.54,1992.01) J1001.S@2961.31,2055.64 ; 2891.43,1737.48 ccw(c2875.29,1843.05) J1002.S@2961.35,1779.81 ; 2891.43,2612.48 ccw(c2875.29,2718.05) J1001.S@2961.35,2654.81 ; 2894.29,1202.3 ccw(c2929.68,1222.72) J1002.S@2943.68,1184.34 ; 2894.29,2077.3 ccw(c2929.68,2097.72) J1001.S@2943.68,2059.34 ; 2894.6,1757.94 cw(c2930.03,1737.49) J1002.S@2943.78,1776.01 ; 2894.6,2632.94 cw(c2930.03,2612.49) J1001.S@2943.78,2651.01 ; J1002.S@2941.54,1183.35 ccw(c2853.94,1336.93) 3024.72,1291.17 ; J1001.S@2941.54,2058.35 ccw(c2853.94,2211.93) 3024.72,2166.17 ; J1002.S@2956.4,1157.29 ccw(c2904.06,1249.07) 3006.11,1221.72 ; J1001.S@2956.4,2032.29 ccw(c2904.06,2124.07) 3006.11,2096.72 ; 2980.66,1238.7 ccw(c3038.62,1223.17) J1002.S@2986.66,1193.17 ; 2980.66,2113.7 ccw(c3038.62,2098.17) J1001.S@2986.66,2068.17 ; J1002.7@3078.43,1355 2948.5,1225.08 J1002.S@2948.5,1171.14 J1002.S@2912.28,1171.14 ; J1002.3@3078.43,1555 3015,1555 2948.5,1621.5 J1002.S@2948.5,1789.25 ; J1001.7@3078.43,2230 2948.5,2100.08 J1001.S@2948.5,2046.14 ; J1001.3@3078.43,2430 2990,2430 2948.5,2471.5 J1001.S@2948.5,2664.25 ; U1001.2@3225,3470 3380,3470 3390,3470 3430,3430 C1002.2@3550,3430 C1002.2@3560,3430 ; C1002.2@3560,3420 3618.9,3361.1 C1003.2@3618.9,3158.9 ; C1005.1@3588.01,3026.89 cw(c3557.76,2974.5) 3616.2,2990.16 ; 3601.7,3091.24 ccw(c3549.96,3121.11) C1003.2@3605.06,3144.2 ; C1003.2@3618.9,3150 C1003.2@3618.9,3158.9 ; C1010.1@3953.39,2340 3830,2340 3660,2510 ; J1002.S@2828.43,1255 ccw(c2927.43,1354) 2943.46,1214.91 cw(c2927.43,1354) J1002.S@2828.43,1255 ; J1002.S@2828.43,1255 J1002.S@2912.28,1171.14 ; J1002.S@2828.43,1705 cw(c2928.17,1605.27) 2943.66,1745.46 ccw(c2928.17,1605.27) J1002.S@2828.43,1705 ; J1002.S@2828.43,1705 2912.68,1789.25 J1002.S@2948.5,1789.25 ; J1001.S@2828.43,2130 ccw(c2927.43,2229) 2943.46,2089.91 cw(c2927.43,2229) J1001.S@2828.43,2130 ; J1001.S@2828.43,2130 J1001.S@2912.28,2046.14 ; J1001.S@2828.43,2580 cw(c2928.17,2480.27) 2943.66,2620.46 ccw(c2928.17,2480.27) J1001.S@2828.43,2580 ; J1001.S@2828.43,2580 2912.68,2664.25 J1001.S@2948.5,2664.25 ; J1002.S@2842.37,1757.06 ccw(c2861.76,1829.42) J1002.S@2899.22,1764.55 ; J1002.S@2842.37,1757.06 ccw(c2861.76,1829.42) J1002.S@2899.22,1764.55 ; J1002.S@2842.37,1757.06 ccw(c2861.76,1829.42) J1002.S@2899.22,1764.55 ; J1001.S@2842.37,2632.06 ccw(c2861.76,2704.42) J1001.S@2899.22,2639.55 ; J1001.S@2842.37,2632.06 ccw(c2861.76,2704.42) J1001.S@2899.22,2639.55 ; J1001.S@2842.37,2632.06 ccw(c2861.76,2704.42) J1001.S@2899.22,2639.55 ; J1002.S@2842.38,1202.94 cw(c2861.85,1130.26) J1002.S@2899.47,1195.42 ; J1002.S@2842.38,1202.94 cw(c2861.85,1130.26) J1002.S@2899.47,1195.42 ; J1002.S@2842.38,1202.94 cw(c2861.85,1130.26) J1002.S@2899.47,1195.42 ; J1001.S@2842.38,2077.94 cw(c2861.85,2005.26) J1001.S@2899.47,2070.42 ; J1001.S@2842.38,2077.94 cw(c2861.85,2005.26) J1001.S@2899.47,2070.42 ; J1001.S@2842.38,2077.94 cw(c2861.85,2005.26) J1001.S@2899.47,2070.42 ; J1002.S@2882.29,1253.03 ccw(c2959.87,1250.2) J1002.S@2921.05,1182.96 ; J1002.S@2882.29,1253.03 ccw(c2959.87,1250.2) J1002.S@2921.05,1182.96 ; J1002.S@2882.29,1253.03 ccw(c2959.87,1250.2) J1002.S@2921.05,1182.96 ; J1002.S@2882.29,1706.81 cw(c2960.72,1709.44) J1002.S@2921.48,1777.4 ; J1002.S@2882.29,1706.81 cw(c2960.72,1709.44) J1002.S@2921.48,1777.4 ; J1002.S@2882.29,1706.81 cw(c2960.72,1709.44) J1002.S@2921.48,1777.4 ; J1001.S@2882.29,2128.03 ccw(c2959.87,2125.2) J1001.S@2921.05,2057.96 ; J1001.S@2882.29,2128.03 ccw(c2959.87,2125.2) J1001.S@2921.05,2057.96 ; J1001.S@2882.29,2128.03 ccw(c2959.87,2125.2) J1001.S@2921.05,2057.96 ; J1001.S@2882.29,2581.81 cw(c2960.72,2584.44) J1001.S@2921.48,2652.4 ; J1001.S@2882.29,2581.81 cw(c2960.72,2584.44) J1001.S@2921.48,2652.4 ; J1001.S@2882.29,2581.81 cw(c2960.72,2584.44) J1001.S@2921.48,2652.4 ; J1002.S@2912.28,1171.15 cw(c2985.47,1244.34) 2882.2,1251.35 ccw(c2985.47,1244.34) J1002.S@2912.28,1171.15 ; J1002.S@2912.28,1171.15 ccw(c2839.08,1097.95) 2832.08,1201.23 cw(c2839.08,1097.95) J1002.S@2912.28,1171.15 ; J1001.S@2912.28,2046.15 cw(c2985.47,2119.34) 2882.2,2126.35 ccw(c2985.47,2119.34) J1001.S@2912.28,2046.15 ; J1001.S@2912.28,2046.15 ccw(c2839.08,1972.95) 2832.08,2076.23 cw(c2839.08,1972.95) J1001.S@2912.28,2046.15 ; J1001.S@2912.28,2046.14 J1001.S@2948.5,2046.14 ; J1002.S@2912.67,1789.25 cw(c2838.61,1863.31) 2831.89,1758.79 ccw(c2838.61,1863.31) J1002.S@2912.67,1789.25 ; J1002.S@2912.67,1789.25 ccw(c2986.74,1715.18) 2882.21,1708.46 cw(c2986.74,1715.18) J1002.S@2912.67,1789.25 ; J1001.S@2912.67,2664.25 cw(c2838.61,2738.31) 2831.89,2633.79 ccw(c2838.61,2738.31) J1001.S@2912.67,2664.25 ; J1001.S@2912.67,2664.25 ccw(c2986.74,2590.18) 2882.21,2583.46 cw(c2986.74,2590.18) J1001.S@2912.67,2664.25 ; 2948.5,1682.89 cw(c3054.86,1682.89) 2979.66,1758.1 ccw(c3054.86,1682.89) 2948.5,1682.89 ; 2948.5,1682.89 ccw(c2842.15,1682.89) 2917.35,1758.1 cw(c2842.15,1682.89) 2948.5,1682.89 ; J1002.S@2948.5,1789.25 J1001.S@2948.5,2046.14 ; 2948.5,1895.61 cw(c2842.15,1895.61) 2917.35,1820.4 ccw(c2842.15,1895.61) 2948.5,1895.61 ; 2948.5,1895.61 ccw(c3054.86,1895.61) 2979.66,1820.4 cw(c3054.86,1895.61) 2948.5,1895.61 ; 2948.5,1939.78 cw(c3054.86,1939.78) 2979.66,2014.99 ccw(c3054.86,1939.78) 2948.5,1939.78 ; 2948.5,1939.78 ccw(c2842.15,1939.78) 2917.35,2014.99 cw(c2842.15,1939.78) 2948.5,1939.78 ; 2948.5,2557.89 cw(c3054.86,2557.89) J1001.S@2979.66,2633.1 ; 2948.5,2557.89 ccw(c2842.15,2557.89) 2917.35,2633.1 cw(c2842.15,2557.89) 2948.5,2557.89 ; 2948.5,2557.89 cw(c3054.86,2557.89) J1001.S@2979.66,2633.1 ; J1001.S@2948.5,2664.25 3505.75,2664.25 3660,2510 ; J1001.S@2979.66,2633.1 cw(c3054.86,2557.89) 3054.86,2664.25 ; J1001.S@2979.66,2633.1 cw(c3054.86,2557.89) 3054.86,2664.25 ; 3033.51,1555 cw(c3033.51,1519.93) 3058.31,1544.73 ccw(c3033.51,1519.93) 3033.51,1555 ; 3033.51,1555 ccw(c3033.51,1590.07) 3058.31,1565.27 cw(c3033.51,1590.07) 3033.51,1555 ; 3033.51,2430 cw(c3033.51,2394.93) 3058.31,2419.73 ccw(c3033.51,2394.93) 3033.51,2430 ; 3033.51,2430 ccw(c3033.51,2465.07) 3058.31,2440.27 cw(c3033.51,2465.07) 3033.51,2430 ; 3048.79,1317.4 ccw(c3010.22,1341.36) J1002.7@3054.44,1351.69 ; 3048.79,1317.4 ccw(c3010.22,1341.36) J1002.7@3054.44,1351.69 ; 3048.79,1317.4 ccw(c3010.22,1341.36) J1002.7@3054.44,1351.69 ; 3048.79,2192.4 ccw(c3010.22,2216.36) J1001.7@3054.44,2226.69 ; 3048.79,2192.4 ccw(c3010.22,2216.36) J1001.7@3054.44,2226.69 ; 3048.79,2192.4 ccw(c3010.22,2216.36) J1001.7@3054.44,2226.69 ; 3054.86,2664.25 cw(c3054.86,2770.61) 2979.66,2695.4 ccw(c3054.86,2770.61) 3054.86,2664.25 ; 3288.28,3470 cw(c3288.28,3518.28) 3254.14,3484.14 ccw(c3288.28,3518.28) 3288.28,3470 ; 3288.28,3470 ccw(c3288.28,3421.72) 3254.14,3455.86 cw(c3288.28,3421.72) 3288.28,3470 ; 3513.79,3430 cw(c3513.79,3393.79) 3539.39,3419.39 ccw(c3513.79,3393.79) 3513.79,3430 ; 3513.79,3430 ccw(c3513.79,3466.21) 3539.39,3440.61 cw(c3513.79,3466.21) 3513.79,3430 ; 3575.61,3404.39 cw(c3601.21,3430) 3565,3430 ccw(c3601.21,3430) 3575.61,3404.39 ; 3575.61,3404.39 ccw(c3550,3378.79) 3550,3415 cw(c3550,3378.79) 3575.61,3404.39 ; 3599.21,3074.04 ccw(c3630.8,3065.58) C1005.1@3602.48,3049.23 ; 3599.21,3074.04 ccw(c3630.8,3065.58) C1005.1@3602.48,3049.23 ; 3599.21,3074.04 ccw(c3630.8,3065.58) C1005.1@3602.48,3049.23 ; C1003.2@3608.29,3160.61 ccw(c3644.47,3124.43) 3593.31,3124.43 cw(c3644.47,3124.43) C1003.2@3608.29,3160.61 ; C1003.2@3608.29,3160.61 ccw(c3582.68,3186.21) 3618.9,3186.21 ; C1003.2@3608.29,3160.61 ccw(c3582.68,3186.21) 3618.9,3186.21 ; C1003.2@3618.9,3158.9 3614.45,3154.45 3593.31,3133.31 C1005.1@3593.31,3040 3593.31,2996.69 3660,2930 3660,2510 ; 3618.9,3186.21 ccw(c3655.11,3186.21) 3629.5,3160.61 cw(c3655.11,3186.21) 3618.9,3186.21 ; J1002.S@2872.34,1211.09 ccw(c2936.51,1275.26) 2946.9,1185.1 cw(c2936.51,1275.26) J1002.S@2872.34,1211.09 ; J1001.S@2872.34,2086.09 ccw(c2936.51,2150.26) 2946.9,2060.1 cw(c2936.51,2150.26) J1001.S@2872.34,2086.09 ; J1002.S@2872.6,1749.17 cw(c2936.96,1684.82) 2946.96,1775.28 ccw(c2936.96,1684.82) J1002.S@2872.6,1749.17 ; J1001.S@2872.6,2624.17 cw(c2936.96,2559.82) 2946.96,2650.28 ccw(c2936.96,2559.82) J1001.S@2872.6,2624.17 ; J1002.S@2932.56,1171.14 cw(c3024.28,1171.14) 2959.42,1236 ccw(c3024.28,1171.14) J1002.S@2932.56,1171.14 ; J1001.S@2932.56,2046.14 cw(c3024.28,2046.14) 2959.42,2111 ccw(c3024.28,2046.14) J1001.S@2932.56,2046.14 ; J1002.S@2962.56,1171.14 cw(c3126.71,1171.14) 3010.64,1287.21 ccw(c3126.71,1171.14) J1002.S@2962.56,1171.14 ; J1001.S@2962.56,2046.14 cw(c3126.71,2046.14) 3010.64,2162.21 ccw(c3126.71,2046.14) J1001.S@2962.56,2046.14 ; J1002.S@2992.56,1171.14 cw(c3229.13,1171.14) 3061.85,1338.42 ccw(c3229.13,1171.14) J1002.S@2992.56,1171.14 ; J1001.S@2992.56,2046.14 cw(c3229.13,2046.14) 3061.85,2213.42 ccw(c3229.13,2046.14) J1001.S@2992.56,2046.14 ; 3036.82,1313.4 ccw(c2995.22,1355) 3054.06,1355 cw(c2995.22,1355) 3036.82,1313.4 ; 3036.82,2188.4 ccw(c2995.22,2230) 3054.06,2230 cw(c2995.22,2230) 3036.82,2188.4 ; 3334.34,3470 ccw(c3334.34,3518.42) 3368.57,3484.18 cw(c3334.34,3518.42) 3334.34,3470 ; C1004.1@3394.53,3476.69 ccw(c3421.62,3476.69) 3402.46,3457.54 cw(c3421.62,3476.69) C1004.1@3394.53,3476.69 ; C1005.1@3573.9,3036.06 ccw(c3622.09,3036.06) 3588.01,3001.99 cw(c3622.09,3036.06) C1005.1@3573.9,3036.06 ; C1005.1@3593.31,3052.01 cw(c3716.89,3052.01) 3629.5,3139.39 ccw(c3716.89,3052.01) C1005.1@3593.31,3052.01 ; C1005.1@3603.9,3036.06 ccw(c3724.51,3036.06) 3639.23,2950.77 cw(c3724.51,3036.06) C1005.1@3603.9,3036.06